# EAGLE board untitled2 (EAGLE 6.2)
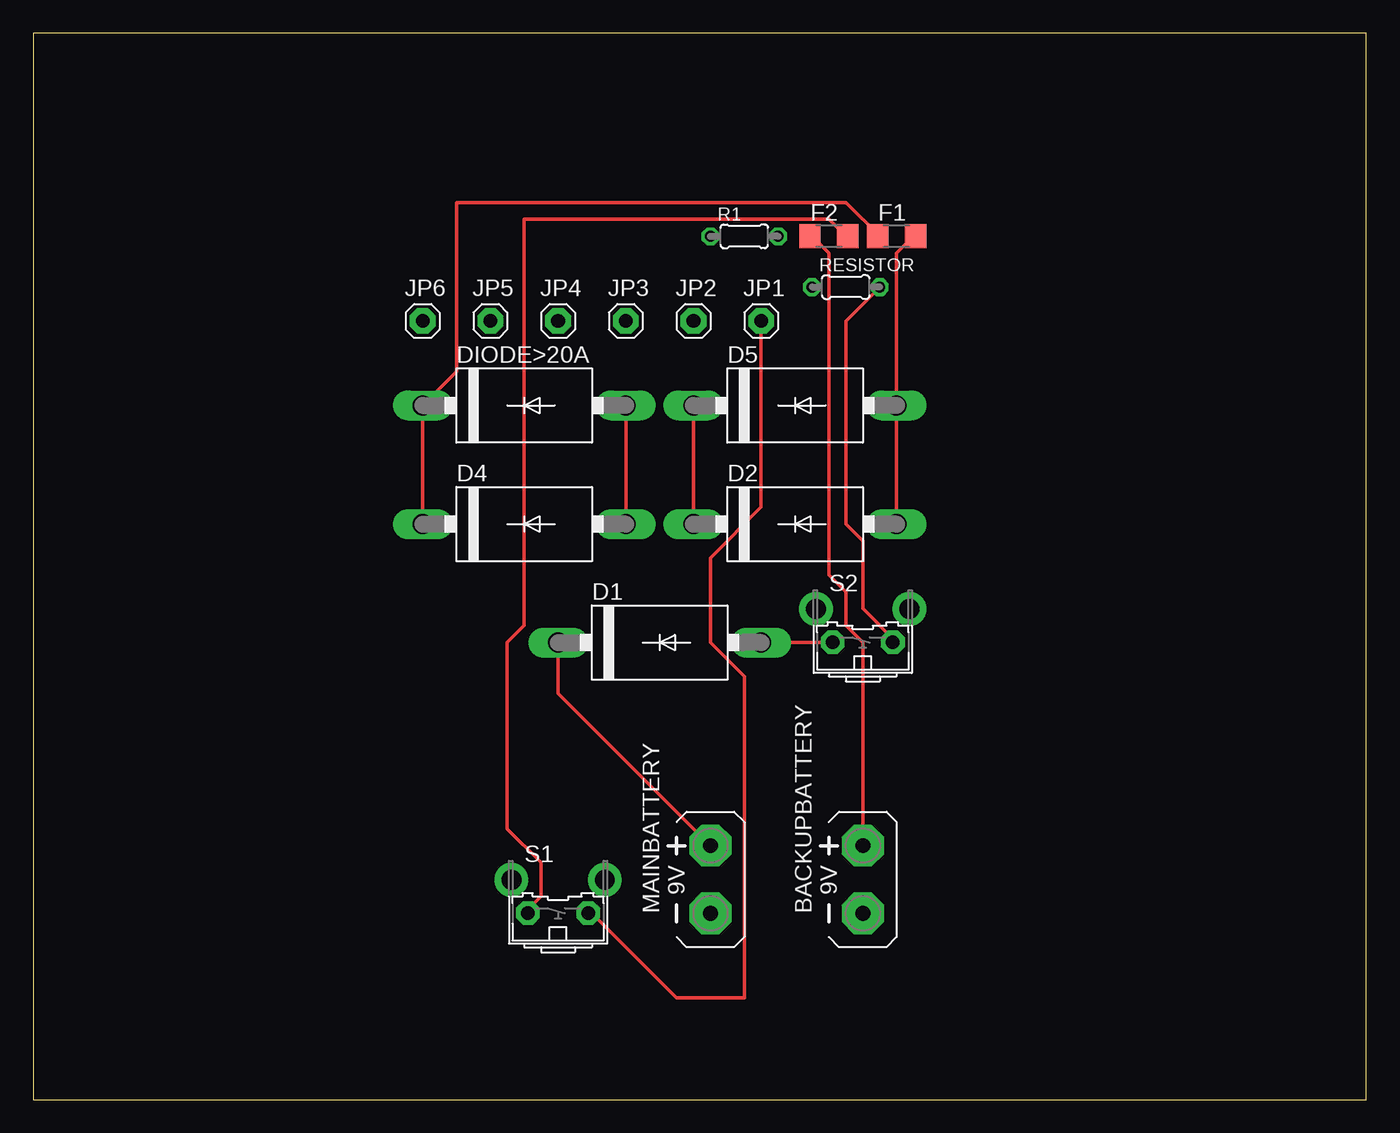
[diagram p0: board, top side]
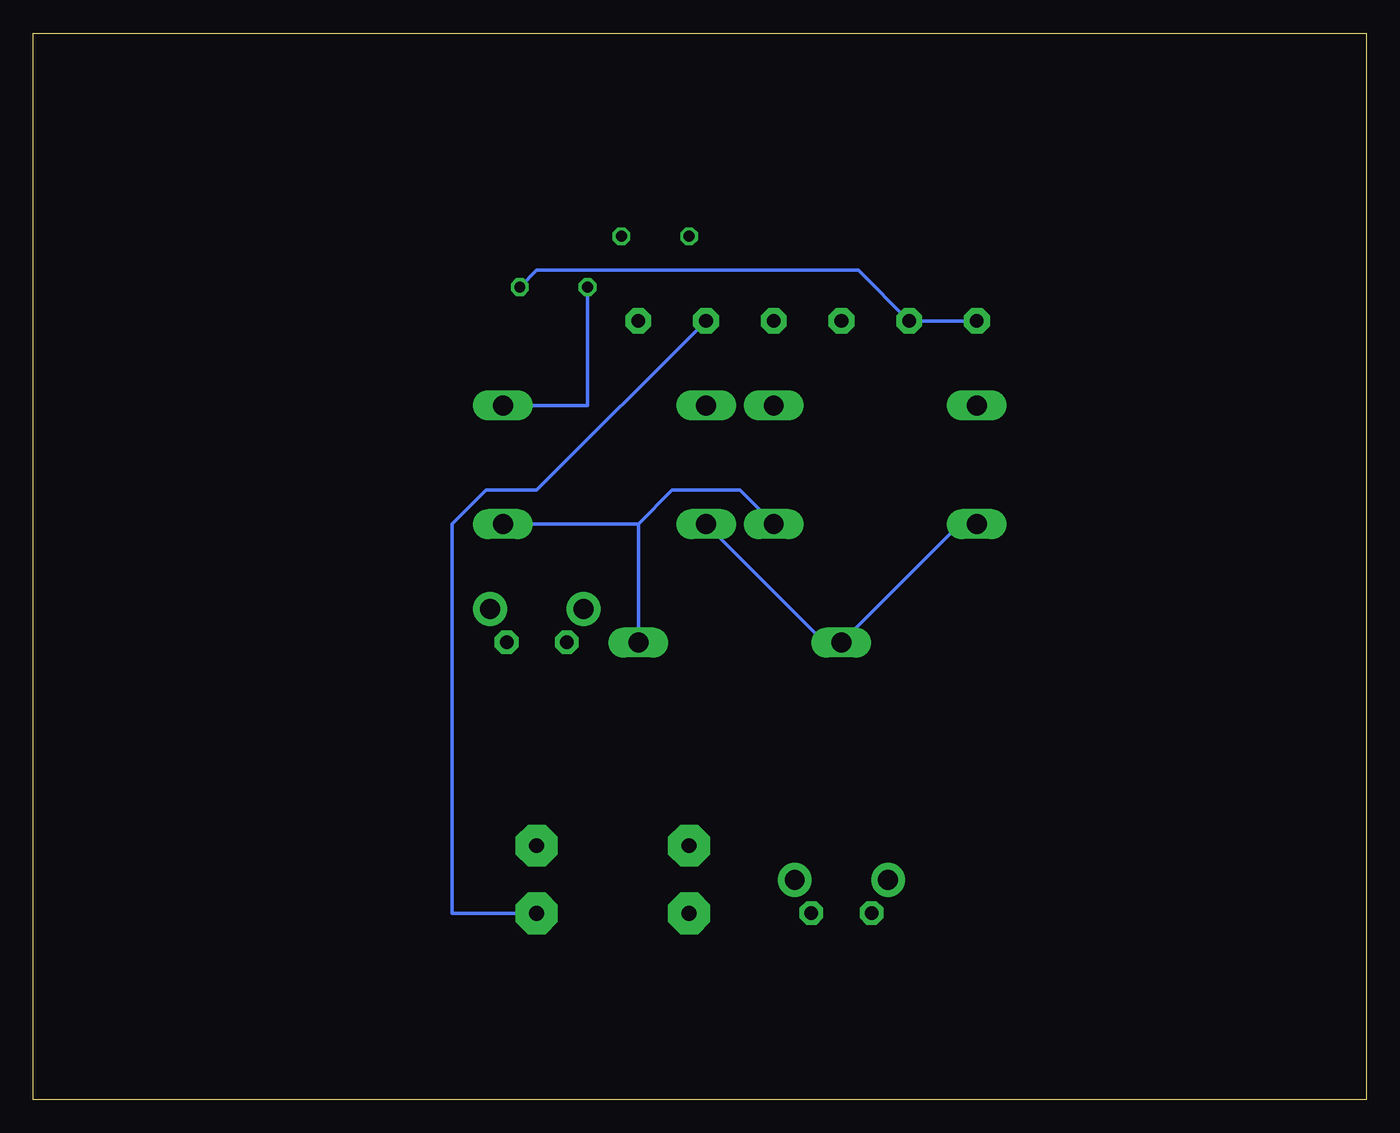
[diagram p1: board, bottom side, seen from below]

Size 100 x 80 mm. Coordinates in mm from the lower left corner, seen from the top.
Outline: 0,0 100,0 100,80 0,80 0,0
Copper layers (1*16): Top 0.035mm / dielectric 1.5mm / Bottom 0.035mm
Design rules: minimum track width 10mil, minimum drill 24mil, track to track 8mil, track to pad 8mil, pad to pad 8mil, via to via 8mil, smd to smd 8mil, copper to edge 40mil, drill to drill 8mil, minimum pad ring 10mil, minimum via ring 8mil, stop-mask expansion 4mil, vias tented up to drill 0mil, thermal gap 10mil

## Footprints (pad centres in the part's own frame; a part is rotated, then mirrored left to right if it is on the bottom)
AB9V = drill 1.118 pad 3.15 octagon: + 0,2.54; - 0,-2.54
DO201-15 = drill 1.499 long: A 7.62,0; C -7.62,0
R1206 = smd 1.6 x 1.803: 1 -1.422,0; 2 1.422,0
1X01 = drill 1.016 pad 1.93 octagon: 1 0,0
0204/5 = drill 0.813 octagon: 1 -2.54,0; 2 2.54,0
B3F-31XX = drill 1.016 pad 1.778 octagon: 1 -2.261,-1.245; 2 2.261,-1.245 | drill 1.499 pad 2.54: 3 -3.505,1.245; 4 3.505,1.245

## Placement (x,y rotation side)
BACKUPBATTERY  230V  [AB9V]  62.23,16.51 0 top
D1  BY500  [DO201-15]  46.99,34.29 0 top
D2  BY500  [DO201-15]  57.15,43.18 0 top
D4  BY500  [DO201-15]  36.83,43.18 0 top
D5  BY500  [DO201-15]  57.15,52.07 0 top
DIODE>20A  BY500  [DO201-15]  36.83,52.07 0 top
F1  [R1206]  64.77,64.77 0 top
F2  [R1206]  59.69,64.77 0 top
JP1  [1X01]  54.61,58.42 0 top
JP2  [1X01]  49.53,58.42 0 top
JP3  [1X01]  44.45,58.42 0 top
JP4  [1X01]  39.37,58.42 0 top
JP5  [1X01]  34.29,58.42 0 top
JP6  [1X01]  29.21,58.42 0 top
MAINBATTERY  230V  [AB9V]  50.8,16.51 0 top
R1  [0204/5]  53.34,64.77 0 top
RESISTOR  1K,0.5W  [0204/5]  60.96,60.96 0 top
S1  [B3F-31XX]  39.37,15.24 0 top
S2  [B3F-31XX]  62.23,35.56 0 top

## Library data of the parts
BACKUPBATTERY MAINBATTERY = battery
D1 D2 D4 D5 DIODE>20A = diode (2)
F1 F2 JP1-JP6 S1 S2 = adafruit
R1 RESISTOR = rcl

## Nets
.: D1.C D2.C D4.C D5.C DIODE>20A.C F1.1 MAINBATTERY.+
GND: MAINBATTERY.-
N$2: D1.A D2.A D4.A D5.A DIODE>20A.A F1.2 RESISTOR.1 S2.1
N$3: JP5.1 JP6.1 RESISTOR.2 S2.2
N$4: BACKUPBATTERY.+ F2.1
N$5: F2.2 S1.1
N$6: JP1.1 S1.2
N$7: BACKUPBATTERY.- JP2.1

## Tracks (layer width: path | path; a pad name or v marks a point on that pad's centre or on a via)
.
  Top 0.254: D5.C D2.C | F1.1 63.5,64.77 60.96,67.31 31.75,67.31 31.75,54.61 DIODE>20A.C D4.C | MAINBATTERY.+ 39.37,30.48 D1.C
  Bottom 0.254: D4.C 30.48,43.18 D1.C 40.64,34.29 D2.C
N$2
  Top 0.254: DIODE>20A.A D4.A | D1.A 59.69,34.29 S2.1 | F1.2 66.04,64.77 64.77,63.5 D5.A D2.A
  Bottom 0.254: RESISTOR.1 58.42,52.07 D5.A | 54.61,43.18 D1.A | D2.A 54.61,43.18 | D4.A 46.99,45.72 52.07,45.72 54.61,43.18
N$3
  Top 0.254: RESISTOR.2 60.96,58.42 60.96,43.18 62.23,41.91 62.23,36.83 64.77,34.29 S2.2
  Bottom 0.254: RESISTOR.2 62.23,62.23 38.1,62.23 JP5.1 JP6.1
N$4
  Top 0.254: BACKUPBATTERY.+ 62.23,34.29 60.96,35.56 60.96,38.1 59.69,39.37 59.69,63.5 58.42,64.77 F2.1
N$5
  Top 0.254: F2.2 60.96,64.77 59.69,66.04 36.83,66.04 36.83,35.56 35.56,34.29 35.56,20.32 38.1,17.78 38.1,15.24 36.83,13.97 S1.1
N$6
  Top 0.254: JP1.1 54.61,44.45 50.8,40.64 50.8,34.29 53.34,31.75 53.34,7.62 48.26,7.62 41.91,13.97 S1.2
N$7
  Bottom 0.254: JP2.1 62.23,45.72 66.04,45.72 68.58,43.18 68.58,13.97 BACKUPBATTERY.-